# Altium PCB PCB.PcbDoc
Units mil, origin at the board's own origin, x right, y up, seen from the top; angles counter-clockwise.
Board outline 2675 x 4105 mil, 2 copper layers (Top Layer, Bottom Layer); 37 components, 38 nets, 169 pads, 0 vias.
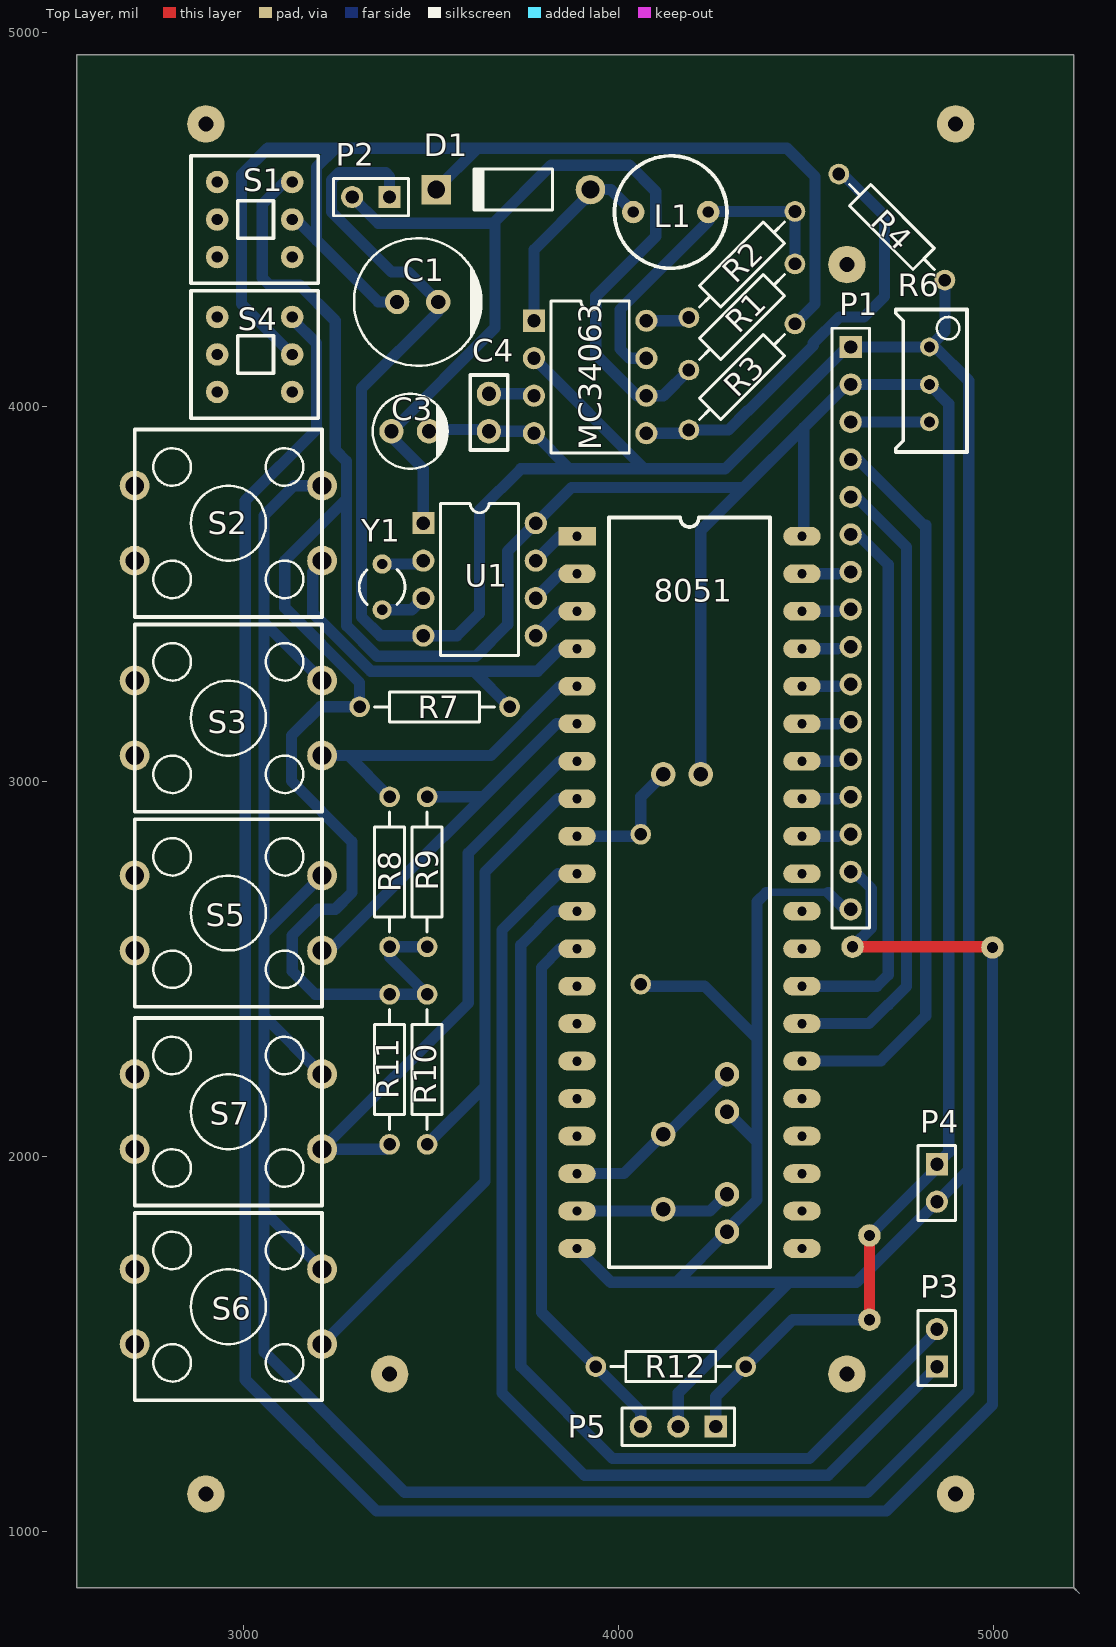
[diagram p0: Top Layer view]
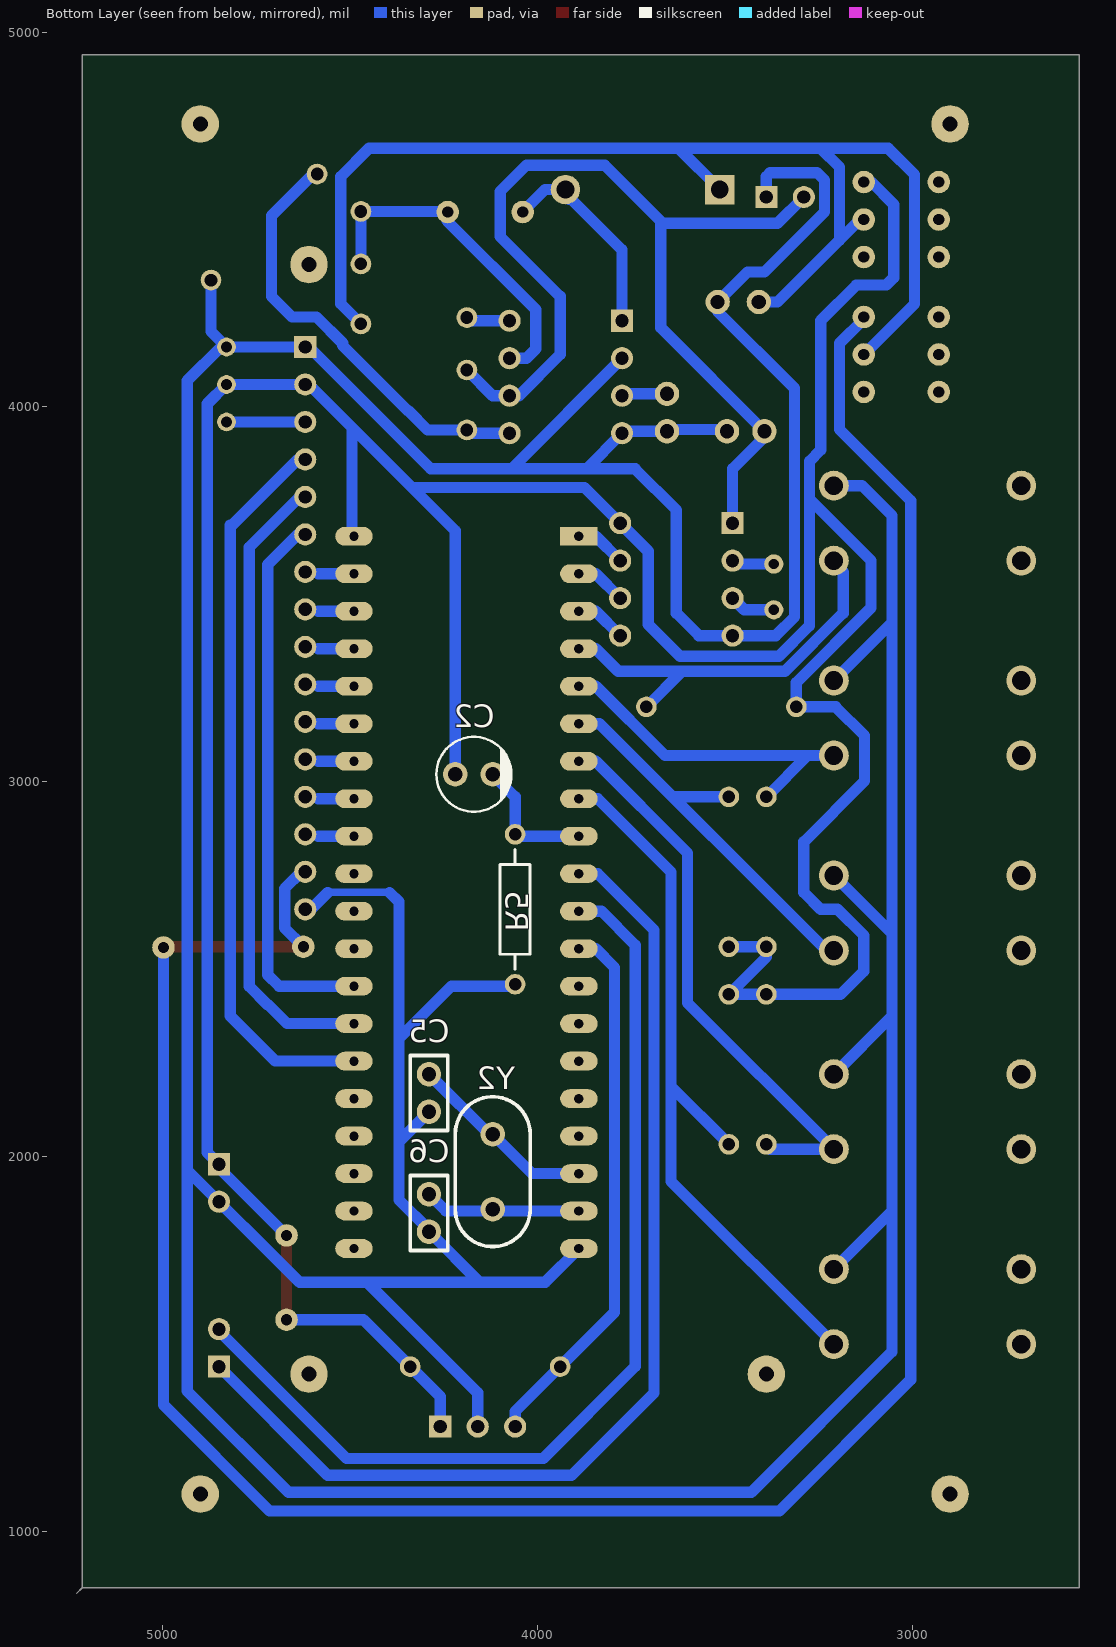
[diagram p1: Bottom Layer view, seen from below]

## Layer stack, top to bottom
Top Layer: signal copper 1.4
Dielectric: dielectric 12.6, FR-4, Dk 4.8
Bottom Layer: signal copper 1.4

## Board outline
2555,4940 2555,850 5215,850 5230,835 5215,850 5215,4940 2555,4940

## Design rules (kind name [scope] priority, off if disabled: settings)
Clearance [All] p1: gap=10
ComponentClearance [All] p1: gap=10 collisioncheckmode=3 verticalgap=10
PolygonConnect [All] p1: connectstyle=Relief reliefconductorwidth=10 reliefentries=4 polygonreliefangle="90 Angle"
RoutingVias [All] p1: holewidth=28 width=50 viastyle="Through Hole" minholewidth=28 minwidth=50 maxholewidth=28 maxwidth=50
SolderMaskExpansion [All] p1: expansion=4
TestPointUsage [All] p1: valid=0 allowmultiple=FALSE
Testpoint [All] p1: side=15 testpointundercomponent=TRUE minsize=40 maxsize=100 preferedsize=60 minholesize=0 maxholesize=40 preferedholesize=32 testpointgrid=1 style=1023 order=0-112345678
Width [All] p1: maxlimit=50 minlimit=20 preferedwidth=40
18 further rules are at their usual default settings.

## Components (designator, comment, footprint, x,y, rotation, side; value= is the part's Value field where it differs from the comment)
8051 "U?" DIP-40 3890,3655 r0 top
C1 "Cap Pol1" CAP-.1/.3 3410,4280 r0 top
C2 "Cap Pol1" CAP-.1/.2 4220,3020 r180 bottom
C3 "Cap Pol1" CAP-.1/.2 3395,3935 r0 top
C4 "Cap" CAP 3655,3935 r90 top
C5 "Cap" CAP 4290,2220 r270 bottom
C6 "Cap" CAP 4290,1900 r270 bottom
D1 "Diode 1N5819" DO-41 3720,4580 r180 top
L1 "Inductor" Inductor 4240,4520 r180 top
MC34063 "U?" DIP-8 3925,4080 r270 top
P1 "Header 16" HDR1X16 4620,4160 r270 top
P2 "Header 2" HDR1X2 3390,4560 r180 top
P3 "Header 2" HDR1X2 4850,1440 r90 top
P4 "Header 2" HDR1X2 4850,1980 r270 top
P5 "Header 3" HDR1X3 4260,1280 r180 top
R1 "Res2" AXIAL-0.4 4330,4240 r45 top
R2 "Res2" AXIAL-0.4 4330,4380 r225 top
R3 "Res2" AXIAL-0.4 4330,4080 r45 top
R4 "Res2" AXIAL-0.4 4730,4480 r135 top
R5 "Res2" AXIAL-0.4 4060,2660 r90 bottom
R6 "Res Tap" RW 4830,4160 r270 top
R7 "Res2" AXIAL-0.4 3510,3200 r180 top
R8 "Res2" AXIAL-0.4 3390,2760 r270 top
R9 "Res2" AXIAL-0.4 3490,2760 r270 top
R10 "Res2" AXIAL-0.4 3490,2233.08 r90 top
R11 "Res2" AXIAL-0.4 3390,2233.08 r90 top
R12 "Res2" AXIAL-0.4 4140,1440 r0 top
S1 "SW-SPDT" SW-6 3030,4500 r180 top
S2 "SW-PB" Switch-12/12 2960,3690 r270 top
S3 "SW-PB" Switch-12/12 2960,3170 r270 top
S4 "SW-SPDT" SW-6 3030,4140 r180 top
S5 "SW-PB" Switch-12/12 2960,2650 r270 top
S6 "SW-PB" Switch-12/12 2960,1600 r270 top
S7 "SW-PB" Switch-12/12 2960,2120 r270 top
U1 "DS1302" DIP-8 3630,3540 r270 top
Y1 "32768" R38 3370,3520 r0 top
Y2 "12MHZ" XTAL 4120,1960 r90 bottom

## Footprints (in the part's own frame and the unit in brackets; to place one, negate y for a bottom-side part, rotate by r counter-clockwise, add the part's x,y. Pads: shape width x height; smd on the part's side, far side on the other; paste and mask are expansions set on the pad)
AXIAL-0.4 [mm] "Resistor; 2 Leads"
  round 1.4 hole 0.85: 1(-5.08,0) 2(5.08,0)
  silkscreen extent -4.06,-1.02 4.06,1.02
CAP [mil]
  round 65 hole 38: 1(0,0) 2(100,0)
  silkscreen extent -50,-50 150,50
CAP-.1/.2 [mil] "0.1uF 1uF 2.2uF 4.7uF 10uF 22uF"
  round 65 hole 38: 1(0,0) 2(100,0)
  silkscreen extent -50,-100 150,100
CAP-.1/.3 [mil] "47uF 100uF 220uF 470uF"
  round 65 hole 38: 1(0,0) 2(110,0)
  silkscreen extent -115,-170 226,170
DIP-8 [mm] "DIP; 8 Leads; Row Spacing 7.62 mm; Pitch 2.54 mm"
  rect 1.5x1.5 hole 0.9: 1(-3.81,-3.81)
  round 1.5 hole 0.9: 2(-1.27,-3.81) 3(1.27,-3.81) 4(3.81,-3.81) 5(3.81,3.81) 6(1.27,3.81) 7(-1.27,3.81) 8(-3.81,3.81)
  silkscreen extent -5.15,-2.65 5.15,2.65
DIP-40 [mil]
  rect 100x50 hole 25: 1(0,0)
  oval 100x50 hole 25: 2(0,-100) 3(0,-200) 4(0,-300) 5(0,-400) 6(0,-500) 7(0,-600) 8(0,-700) 9(0,-800) 10(0,-900) 11(0,-1000) 12(0,-1100) 13(0,-1200) 14(0,-1300) 15(0,-1400) 16(0,-1500) 17(0,-1600) 18(0,-1700) 19(0,-1800) 20(0,-1900) 21(600,-1900) 22(600,-1800) 23(600,-1700) 24(600,-1600) 25(600,-1500) 26(600,-1400) 27(600,-1300) 28(600,-1200) 29(600,-1100) 30(600,-1000) 31(600,-900) 32(600,-800) 33(600,-700) 34(600,-600) 35(600,-500) 36(600,-400) 37(600,-300) 38(600,-200) 39(600,-100) 40(600,0)
  silkscreen extent 85,-1950 515,50
DO-41 [mm] "Diode, Axial; Body 5.2 x 2.7 mm (LxDia. max), Lead Dia. 0.86 mm (max)"
  round 2 hole 1.2: 1(-5.23,0)
  rect 2x2 hole 1.2: 2(5.23,0)
  silkscreen extent -2.65,-1.4 2.75,1.4
HDR1X2 [mm] "Connector; Header; 2 Position"
  rect 1.5x1.5 hole 0.9: 1(0,0)
  round 1.5 hole 0.9: 2(2.54,0)
  silkscreen extent -1.27,-1.27 3.81,1.27
HDR1X3 [mm] "Connector; Header; 3 Position"
  rect 1.5x1.5 hole 0.9: 1(0,0)
  round 1.5 hole 0.9: 2(2.54,0) 3(5.08,0)
  silkscreen extent -1.27,-1.27 6.35,1.27
HDR1X16 [mm] "Connector; Header; 16 Position"
  rect 1.5x1.5 hole 0.9: 1(0,0)
  round 1.5 hole 0.9: 2(2.54,0) 3(5.08,0) 4(7.62,0) 5(10.16,0) 6(12.7,0) 7(15.24,0) 8(17.78,0) 9(20.32,0) 10(22.86,0) 11(25.4,0) 12(27.94,0) 13(30.48,0) 14(33.02,0) 15(35.56,0) 16(38.1,0)
  silkscreen extent -1.27,-1.27 39.37,1.27
Inductor [mil]
  round 60 hole 30: 1(0,0) 2(200,0)
  silkscreen extent -50,-150 250,150
R38 [mm] "Crystal, Thru-Hole; 2 Leads; Body 3.1 x 8.2 mm (Dia.xH)"
  round 1.3 hole 0.7: 1(0,1.55) 2(0,-1.55)
  silkscreen extent -1.55,-1.19 1.55,1.17
RW [mil]
  round 50 hole 30: 1(0,0) 2(100,0) 3(200,0)
  silkscreen extent -100,-90 280,100
SW-6 [mil]
  round 60 hole 30: 1(-100,100) 2(-100,0) 3(-100,-100) 4(100,-100) 5(100,0) 6(100,100)
  silkscreen extent -170,-170 170,170
Switch-12/12 [mil]
  round 80 hole 50: 1(-100,250) 1(-100,-250) 2(100,250) 2(100,-250)
  silkscreen extent -250,-250 250,250
XTAL [mil]
  round 65 hole 38: 1(-100,0) 2(100,0)
  silkscreen extent -200,-100 200,100

## Part data
8051: library part 8051
C1 C2 C3: "Polarized Capacitor (Radial)"
C4 C5 C6: "Capacitor"
D1: library part "Diode 1N4001", "1 Amp General Purpose Rectifier"
MC34063: library part MC34063
P1: "Header, 16-Pin"
P2 P3 P4: "Header, 2-Pin"
P5: "Header, 3-Pin"
R1 R2 R3 R4 R5 R7 R8 R9 R10 R11 R12: "Resistor"
R6: "Tapped Resistor"
S1 S4: "SPDT Subminiature Toggle Switch, Right Angle Mounting, Vertical Actuation"
S2 S3 S5 S6 S7: "Switch"
Y1 Y2: library part XTAL, "Crystal Oscillator"

## Free pads (board coordinates)
  round 100 hole 40: 0(2900,1100) 0(2900,4755) 0(3390,1420) 0(4610,1420) 0(4610,4380) 0(4900,1100) 0(4900,4755)
  round 60 hole 30: 0(4998.17,2558.17) 1(4625,2560) 1(4670,1790) 2(4670,1565)

## Nets (pads, with @x,y where several pads share a name; then routed paths per layer and width w, separated by ;. In a path a pad name is that pad's centre, name@x,y a point inside that pad or via, vN(x,y) a via of type N, cw(c..) or ccw(c..) an arc to the next point about the centre after c; other vN are vias at no path point)
+5: 8051.40 C2.1 P1.2 P4.1 P5.1 pad.1@4670,1790 pad.2 R6.2 R7.2 R8.2 R9.2 R10.2 R11.2 R12.2 S1.3 U1.8 | length 10008.9
  Top Layer w30: pad.2 pad.1@4670,1790
  Bottom Layer w30: S1.3 3110,4600 3050,4540 3050,4345 3070,4325 3150,4325 3245,4230 3245,3885 3275,3855 3275,3416.57 3356.57,3335 3620,3335 3705,3420 3705,3615 3875,3785 4335,3785 ; 3275,3754.5 3110.5,3590 3110.5,3464.5 3310,3265 R7.2 3205,3200 3128.1,3123.1 3128.1,3001.9 3290,2840 3290,2705 3245,2660 3200,2660 3130,2590 3130,2495 3191.92,2433.08 R10.2 3390,2533.08 R8.2 R9.2 ; C2.1 4220,3670 4610,4060 R6.2 4881.41,4008.59 4881.41,2011.41 P4.1 4850,1970 pad.1@4670,1790 ; P5.1 4260,1360 4465,1565 pad.2 ; 8051.40@4495.07,3660.07 4495.07,3945.07
+5-1: P1.15 pad.0@4998.17,2558.17 pad.1@4625,2560 S4.3 | length 7049.3
  Top Layer w30: pad.1@4625,2560 4996.33,2560 pad.0@4998.17,2558.17
  Bottom Layer w30: S4.3 3130,4235 3195,4170 3195,3940 3005,3750 3005,1405 3355,1055 4715,1055 4998.17,1338.17 pad.0@4998.17,2558.17 ; P1.15@4610,2760 4630,2760 4675,2715 4675,2610 pad.1@4625,2560
CONTRAST: P1.3 R6.3 | length 220
  Bottom Layer w30: P1.3@4610,3960 R6.3
GND: 8051.20 C1.2 C3.2 C4.1 C5.2 C6.2 MC34063.2 MC34063.4 P1.1 P1.16 P2.1 P4.2 P5.2 R4.1 R5.1 R6.1 S2.1@3210,3790 S3.1@3210,3270 S5.1@3210,2750 S6.1@3210,1700 S7.1@3210,2220 U1.4 | length 16527.7
  Bottom Layer w20: 4395,2705 4560,2705
  Bottom Layer w30: 3055,1855 S6.1@3210,1700 ; 3055,2375 S7.1@3210,2220 ; 3055,2595 3210,2750 S5.1@3195,2750 ; 3055,3425 S3.1@3210,3270 ; S2.1@3210,3790 3135,3790 3055,3710 3055,1480 3430,1105 4665,1105 4935,1375 4935,4070 4845,4160 4610,4160 4285,3835 3740,3835 3630,3725 3630,3450 3570,3390 3365,3390 3315,3440 3315,4050 3520,4255 C1.2 3440,4360 3395,4360 3235,4520 3235,4605 3255,4625 3380,4625 3390,4615 P2.1 ; C3.2@3490,3940 3650,3940 C4.1 MC34063.4@3770,3935 ; MC34063.4 3870,3835 ; MC34063.2 4070,3835 ; 8051.20 3980,1665 4635,1665 4935,1965 ; R5.1@4055,2455 4230,2455 4370,2315 ; 4155,1665 C6.2 ; P5.2@4159.93,1280 4159.93,1370 4454.93,1665 ; C6.2@4287.5,1802.5 4370,1885 4370,2680 4395,2705 ; C5.2 4370,2040 ; 4560,2705 4605,2660 P1.16@4610,2660 ; R6.1 4871.42,4201.42 R4.1
IN: C3.1 MC34063.6 P2.2 R1.1 U1.1 | length 2708.6
  Bottom Layer w30: P2.2 3360,4490 3671.35,4490 ; U1.1 3480,3835 3395,3920 C3.1 3671.35,4211.35 3671.35,4495 3821.35,4645 4030,4645 4100,4575 4100,4455 3940,4295 3940,4140 4050,4030 4120,4030 R1.1
INT0: 8051.12 P5.3 R12.1 | length 1450.5
  Bottom Layer w30: 8051.12 3845,2555 3795,2505 3795,1585 4060,1320 P5.3
KEY1: 8051.4 R7.1 S2.2@3210,3590 | length 1078.8
  Bottom Layer w30: S2.2@3210,3590 3210,3585 3185,3560 3185,3450 3340,3295 3785,3295 3845,3355 8051.4 ; 3615,3295 R7.1
KEY2: 8051.5 R8.1 S3.2@3210,3070 | length 912.2
  Bottom Layer w30: S3.2@3210,3070 3660,3070 3845,3255 8051.5 ; 3280,3070 R8.1
KEY3: 8051.6 R9.1 S5.2@3210,2550 | length 1060.6
  Bottom Layer w30: S5.2@3230,2550 3835,3155 8051.6 ; R9.1 3640,2960
KEY4: 8051.7 R11.1 S7.2@3210,2020 | length 1531.5
  Bottom Layer w30: R11.1@3393.08,2033.08 3380,2020 3210,2020 3600,2410 3600,2810 3845,3055 8051.7
KEY5: 8051.8 R10.1 S6.2@3210,1500 | length 1984.1
  Bottom Layer w30: S6.2@3210,1500 3644.22,1934.22 3644.22,2759.22 3840,2955 8051.8 ; R10.1 3644.22,2187.3
Net8051_1: 8051.1 U1.7 | length 136.9
  Bottom Layer w30: U1.7 3845,3655 8051.1
Net8051_2: 8051.2 U1.6 | length 136.9
  Bottom Layer w30: U1.6 3845,3555 8051.2
Net8051_3: 8051.3 U1.5 | length 136.9
  Bottom Layer w30: U1.5 3845,3455 8051.3
Net8051_9: 8051.9 C2.2 R5.2 | length 364.9
  Bottom Layer w30: 8051.9 4055,2855 R5.2@4055,2860 ; R5.2 4060,2960 C2.2 C2.2@4120,3030
Net8051_18: 8051.18 C5.1 Y2.2 | length 509.8
  Bottom Layer w30: 8051.18 4015,1955 4115,2055 4125,2055 C5.1
Net8051_19: 8051.19 C6.1 Y2.1 | length 418.6
  Bottom Layer w30: 8051.19 4245,1855 C6.1
Net8051_32: 8051.32 P1.14 | length 95
  Bottom Layer w30: 8051.32 4585,2855
Net8051_33: 8051.33 P1.13 | length 95
  Bottom Layer w30: 8051.33 4585,2955
Net8051_34: 8051.34 P1.12 | length 95
  Bottom Layer w30: 8051.34 4585,3055
Net8051_35: 8051.35 P1.11 | length 95
  Bottom Layer w30: 8051.35 4585,3155
Net8051_36: 8051.36 P1.10 | length 95
  Bottom Layer w30: 8051.36 4585,3255
Net8051_37: 8051.37 P1.9 | length 95
  Bottom Layer w30: 8051.37 4585,3355
Net8051_38: 8051.38 P1.8 | length 95
  Bottom Layer w30: 8051.38 4585,3455
Net8051_39: 8051.39 P1.7 | length 95
  Bottom Layer w30: 8051.39 4585,3555
NetC4_2: C4.2 MC34063.3 | length 122.1
  Bottom Layer w30: C4.2 3770,4035 MC34063.3
NetD1_1: D1.1 L1.2 MC34063.1 | length 533.2
  Bottom Layer w30: MC34063.1 3775,4419.09 3915.91,4560 D1.1@3915.91,4554.09 ; D1.1 3980,4580 L1.2
NetL1_1: L1.1 MC34063.7 R1.2 R2.1 | length 914.7
  Bottom Layer w30: MC34063.7 4030,4130 4005,4155 4005,4260 4241.42,4496.42 4241.42,4521.42 R2.1 R1.2
NetMC34063_5: MC34063.5 R3.1 R4.2 | length 1171.7
  Bottom Layer w30: MC34063.5 4180,3930 R3.1 4293.58,3938.58 4345,3990 ; 4345.71,3989.29 4520.71,4164.29 ; 4520,4165 4520,4170 4590,4240 4655,4240 4710,4295 4710,4510 4598.58,4621.42 R4.2
NetMC34063_8: MC34063.8 R2.2 | length 117.1
  Bottom Layer w30: MC34063.8 4180,4230 R2.2
NetU1_2: U1.2 Y1.1 | length 113.7
  Bottom Layer w30: Y1.1 3471.02,3581.02 U1.2
NetU1_3: U1.3 Y1.2 | length 122.9
  Bottom Layer w30: Y1.2 3448.98,3458.98 U1.3
P2.5: 8051.26 P1.4 | length 1974.3
  Bottom Layer w30: 8051.26 4700,2255 4820,2375 4820,3685 ; P1.4@4610,3860 4640,3860 4820,3680
P2.6: 8051.27 P1.5 | length 1706.2
  Bottom Layer w30: 8051.27 4668.77,2355 4719.39,2405.61 ; P1.5@4610,3760 4635,3760 4769.11,3625.89 4769.11,2454.11 4720,2405
P2.7: 8051.28 P1.6 | length 1480.6
  Bottom Layer w30: 8051.28 4690,2455 4720,2485 4720,3580 4640,3660 P1.6@4610,3660
RXD: 8051.10 P3.1 | length 2868.4
  Bottom Layer w30: 8051.10 3840,2755 3690,2605 3690,1370 3910,1150 4560,1150 P3.1
TXD: 8051.11 P3.2 | length 2669.6
  Bottom Layer w30: 8051.11 3830,2655 3740,2565 3740,1440 3985,1195 4510,1195 4850,1535 P3.2
VCC: C1.1 D1.2 R3.2 S1.2 S4.2 | length 3355.4
  Bottom Layer w30: S4.2 2995,4275 2995,4620 3065,4690 4450,4690 4525,4615 4525,4275 R3.2 ; S1.2 3140,4500 3360,4280 C1.1 ; 3195,4445 3195,4639.93 3245.07,4690 ; D1.2@3504.09,4560 D1.2@3519.09,4575 ; D1.2 3624.09,4690
pads on no net: 8051.13 8051.14 8051.15 8051.16 8051.17 8051.21 8051.22 8051.23 8051.24 8051.25 8051.29 8051.30 8051.31 S1.1 S1.4 S1.5 S1.6 S2.1@2710,3790 S2.2@2710,3590 S3.1@2710,3270 S3.2@2710,3070 S4.1 S4.4 S4.5 S4.6 S5.1@2710,2750 S5.2@2710,2550 S6.1@2710,1700 S6.2@2710,1500 S7.1@2710,2220 S7.2@2710,2020

## Silkscreen, mask and mechanical layers (free items; w line width, h text height)
Mechanical 1:
  lines w30: 2800,1000 5100,1000 5100,4850 2800,4850 2800,1000